# EAGLE board CR1000X MUX (EAGLE 9.6.2)
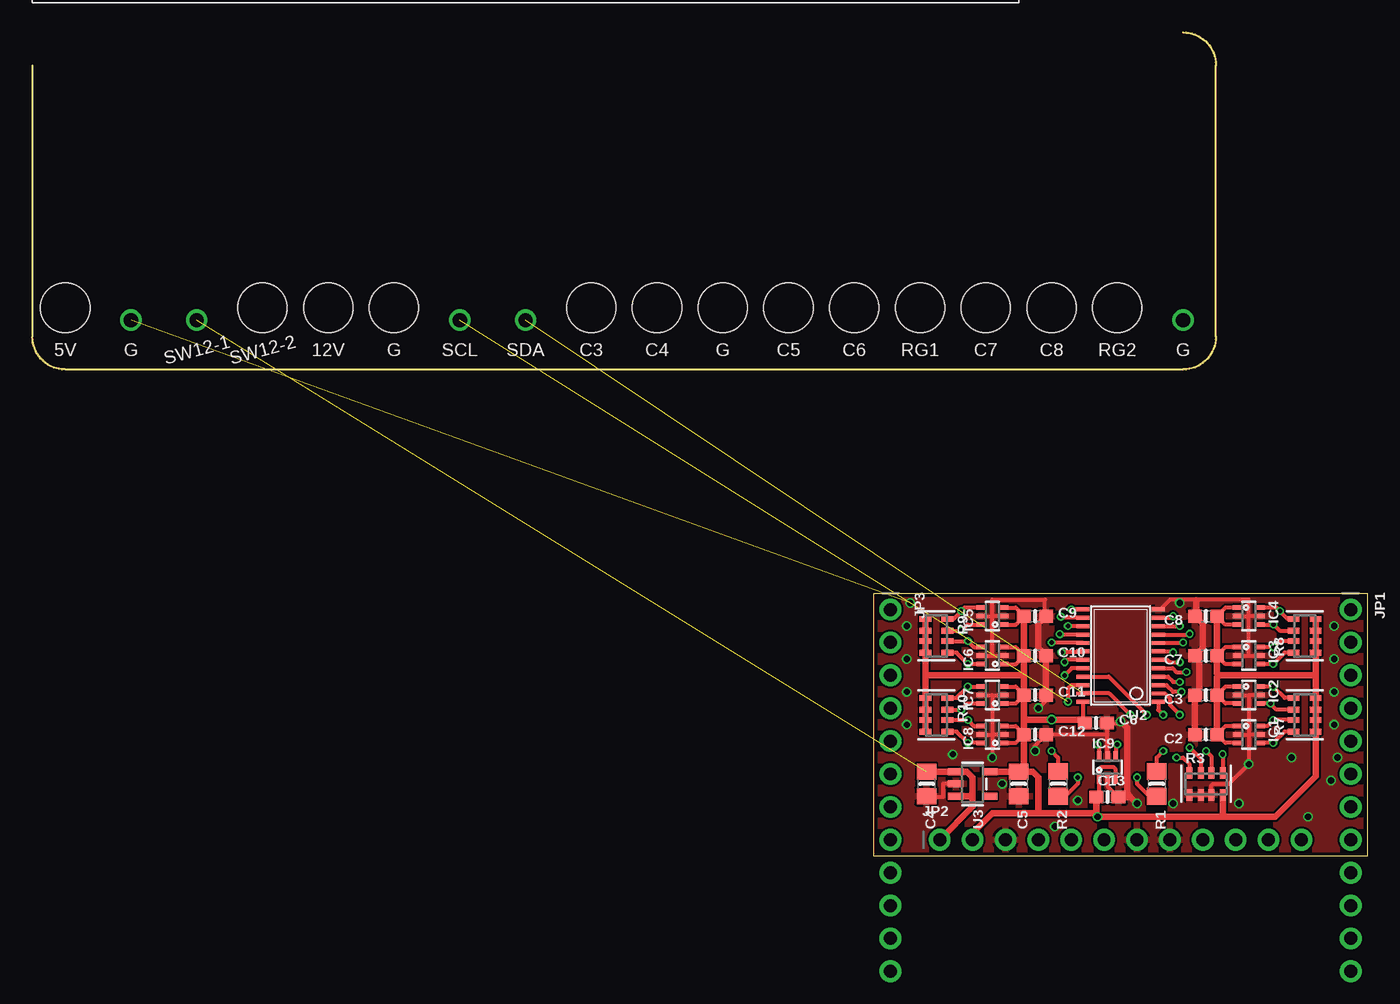
[diagram p0: board, top side]
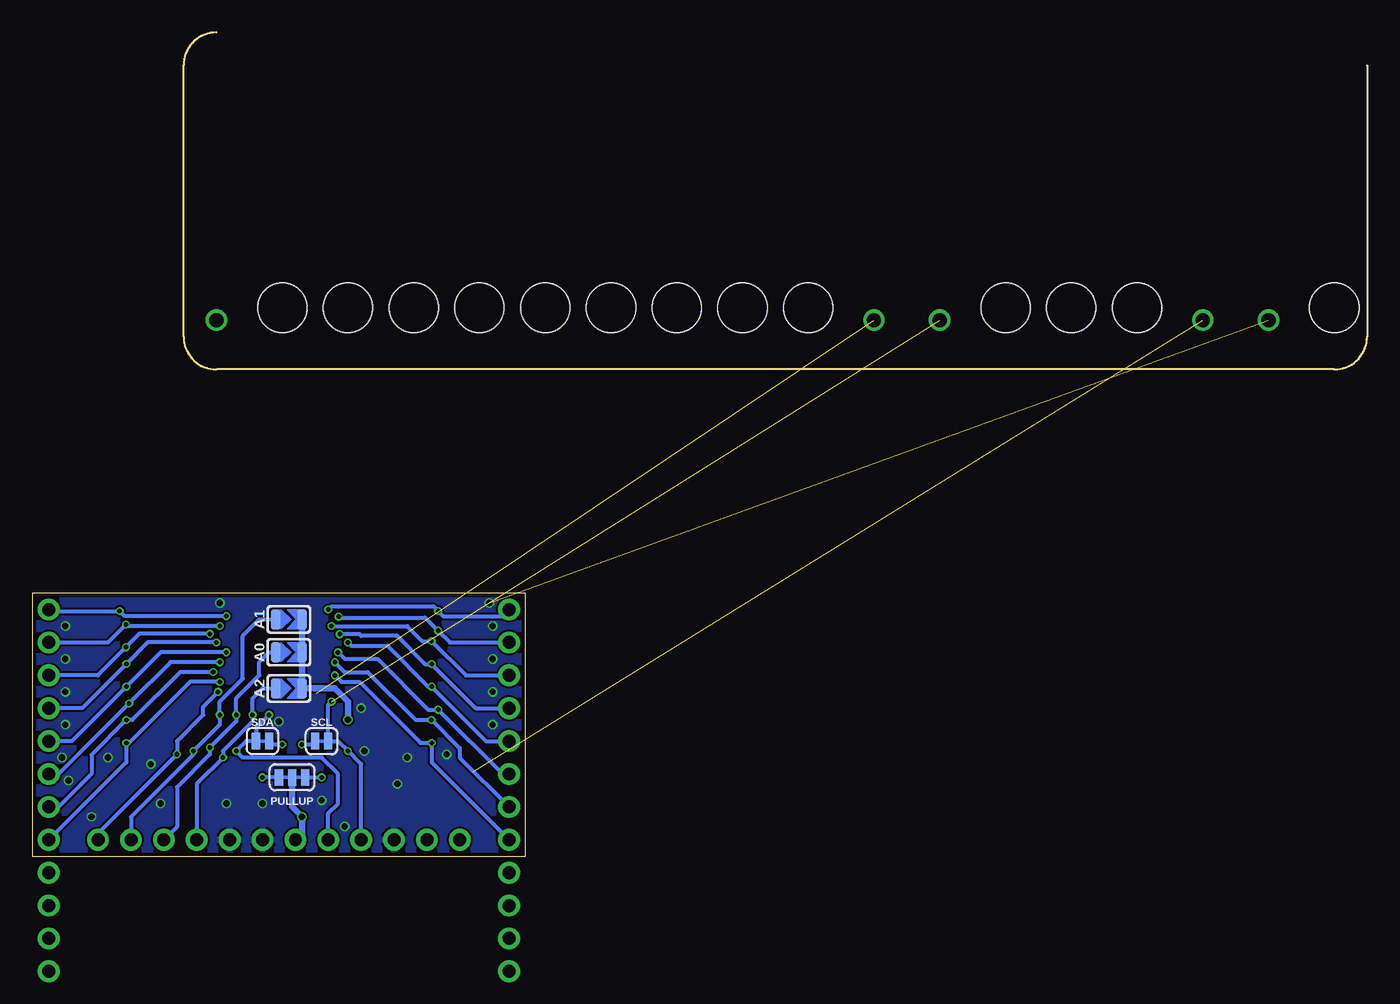
[diagram p1: board, bottom side, seen from below]

Size 103.12 x 63.63 mm. Coordinates in mm from the lower left corner, seen from the top.
Outline: 0,61.09 0,40.13 arc90 2.54,37.59 88.9,37.59 arc90 91.44,40.13 91.44,61.09 arc90 88.9,63.63
Outline: 65.02,20.32 103.12,20.32 103.12,0 65.02,0 65.02,20.32
Copper layers (1*16): Top 0.018mm / dielectric 1.55mm / Bottom 0.018mm
Design rules "eC_2Layer_PClass6_BaseCopperO18_eCDefault": minimum track width 0.15mm, minimum drill 0.35mm, track to track 0.15mm, track to pad 0.15mm, pad to pad 0.15mm, via to via 0.15mm, smd to smd 0mil, copper to edge 0.25mm, drill to drill 0.35mm, minimum pad ring 0.175mm, minimum via ring 0.125mm, stop-mask expansion 0mil, vias tented up to drill 0.45mm, thermal gap 0.2mm
Net classes: 1 highpower: width 0.305 mm, drill 0.483 mm; 2 lowpower: width 0.254 mm, drill 0.483 mm
Holes 3.81 mm at 2.54,42.35 17.78,42.35 22.86,42.35 27.94,42.35 43.18,42.35 48.26,42.35 53.34,42.35 58.42,42.35 63.5,42.35 68.58,42.35 73.66,42.35 78.74,42.35 83.82,42.35

## Footprints (pad centres in the part's own frame; a part is rotated, then mirrored left to right if it is on the bottom)
SOLDERJUMPER_ARROW_NOPASTE = smd 0.762 x 1.524: 1 -1.016,0; 2 1.016,0
0603-NO = smd 1.075 x 1: 1 -0.85,0; 2 0.85,0
0805-NO = smd 1.24 x 1.5: 1 -0.95,0; 2 0.95,0
SC70-6L = smd 0.35 x 0.8: 1 -0.65,-0.85; 2 0,-0.85; 3 0.65,-0.85; 4 0.65,0.85; 5 0,0.85; 6 -0.65,0.85
691311500018 = drill 1.6: 1 -43.18,0; 2 -38.1,0; 3 -33.02,0; 4 -27.94,0; 5 -22.86,0; 6 -17.78,0; 7 -12.7,0; 8 -7.62,0; 9 -2.54,0; 10 2.54,0; 11 7.62,0; 12 12.7,0; 13 17.78,0; 14 22.86,0; 15 27.94,0; 16 33.02,0; 17 38.1,0; 18 43.18,0
691311500015 = drill 1.6: 1 -35.56,0; 2 -30.48,0; 3 -25.4,0; 4 -20.32,0; 5 -15.24,0; 6 -10.16,0; 7 -5.08,0; 8 0,0; 9 5.08,0; 10 10.16,0; 11 15.24,0; 12 20.32,0; 13 25.4,0; 14 30.48,0; 15 35.56,0
WURTH_ELEKTRONIK_ELECTROMECHANIC_TERMINAL_BLOCKS_CONNECTORS_REV19D_691311500018 = drill 1.1: 1 -43.18,0; 2 -38.1,0; 3 -33.02,0; 4 -27.94,0; 5 -22.86,0; 6 -17.78,0; 7 -12.7,0; 8 -7.62,0; 9 -2.54,0; 10 2.54,0; 11 7.62,0; 12 12.7,0; 13 17.78,0; 14 22.86,0; 15 27.94,0; 16 33.02,0; 17 38.1,0; 18 43.18,0
1X12_ROUND = drill 1 pad 1.676: 1 -13.97,0; 2 -11.43,0; 3 -8.89,0; 4 -6.35,0; 5 -3.81,0; 6 -1.27,0; 7 1.27,0; 8 3.81,0; 9 6.35,0; 10 8.89,0; 11 11.43,0; 12 13.97,0
SMT-JUMPER_3_2-NC_TRACE_SILK = smd 0.635 x 1.27: 1 -1.016,0; 2 0,0; 3 1.016,0
0805-NO@1 = smd 1.3 x 1.5: 1 -0.95,0; 2 0.95,0
RESPACK_4X0603 = smd 0.45 x 0.9: 1 -1.3,-0.85; 2 -0.4,-0.85; 3 0.4,-0.85; 4 1.3,-0.85; 5 1.3,0.85; 6 0.4,0.85; 7 -0.4,0.85; 8 -1.3,0.85
SMT-JUMPER_2_NC_TRACE_SILK = smd 0.635 x 1.27: 1 -0.508,0; 2 0.508,0
TSSOP24 = smd 0.305 x 0.991: 1 -3.575,-2.918; 2 -2.925,-2.918; 3 -2.275,-2.918; 4 -1.625,-2.918; 5 -0.975,-2.918; 6 -0.325,-2.918; 7 0.325,-2.918; 8 0.975,-2.918; 9 1.625,-2.918; 10 2.275,-2.918; 11 2.925,-2.918; 12 3.575,-2.918; 13 3.575,2.918; 14 2.925,2.918; 15 2.275,2.918; 16 1.625,2.918; 17 0.975,2.918; 18 0.325,2.918; 19 -0.325,2.918; 20 -0.975,2.918; 21 -1.625,2.918; 22 -2.275,2.918; 23 -2.925,2.918; 24 -3.575,2.918
SOT23-5 = smd 0.55 x 1.2: 1 -0.95,-1.3; 2 0,-1.3; 3 0.95,-1.3; 4 0.95,1.3; 5 -0.95,1.3

## Placement (x,y rotation side)
A0  [SOLDERJUMPER_ARROW_NOPASTE]  83.31,15.75 0 bottom
A1  [SOLDERJUMPER_ARROW_NOPASTE]  83.31,18.29 0 bottom
A2  [SOLDERJUMPER_ARROW_NOPASTE]  83.31,12.95 0 bottom
C2  0.1uF  [0603-NO]  90.68,9.4 180 top
C3  0.1uF  [0603-NO]  90.68,12.45 180 top
C4  10uF  [0805-NO]  69.09,5.59 270 top
C5  10uF  [0805-NO]  76.2,5.59 270 top
C6  0.1uF  [0603-NO]  82.17,10.29 0 top
C7  0.1uF  [0603-NO]  90.68,15.49 180 top
C8  0.1uF  [0603-NO]  90.68,18.54 180 top
C9  0.1uF  [0603-NO]  77.47,18.54 0 top
C10  0.1uF  [0603-NO]  77.47,15.49 0 top
C11  0.1uF  [0603-NO]  77.47,12.45 0 top
C12  0.1uF  [0603-NO]  77.47,9.4 0 top
C13  0.1uF  [0603-NO]  83.06,4.57 0 top
IC1  LTC4311_SC70  [SC70-6L]  93.98,9.4 270 top
IC2  LTC4311_SC70  [SC70-6L]  93.98,12.45 270 top
IC3  LTC4311_SC70  [SC70-6L]  93.98,15.49 270 top
IC4  LTC4311_SC70  [SC70-6L]  93.98,18.54 270 top
IC5  LTC4311_SC70  [SC70-6L]  74.17,18.54 90 top
IC6  LTC4311_SC70  [SC70-6L]  74.17,15.49 90 top
IC7  LTC4311_SC70  [SC70-6L]  74.17,12.45 90 top
IC8  LTC4311_SC70  [SC70-6L]  74.17,9.4 90 top
IC9  LTC4311_SC70  [SC70-6L]  83.06,6.86 0 top
J1  [691311500018]  45.72,99.82 0 top  (outside the outline)
J2  [691311500015]  38.1,70.61 0 top  (outside the outline)
J3  [WURTH_ELEKTRONIK_ELECTROMECHANIC_TERMINAL_BLOCKS_CONNECTORS_REV19D_691311500018]  45.72,41.4 0 top
JP1  [1X12_ROUND]  101.85,5.08 270 top
JP2  [1X12_ROUND]  84.07,1.27 0 top
JP3  [1X12_ROUND]  66.29,5.08 270 top
PULLUP  JUMPER-SMT_3_2-NC_TRACE_SILK  [SMT-JUMPER_3_2-NC_TRACE_SILK]  83.06,6.1 0 bottom
R1  10K  [0805-NO@1]  86.87,5.59 270 top
R2  10K  [0805-NO@1]  79.25,5.59 270 top
R3  10K  [RESPACK_4X0603]  90.68,5.59 0 top
R7  10K  [RESPACK_4X0603]  98.3,10.92 90 top
R8  10K  [RESPACK_4X0603]  98.3,17.02 90 top
R9  10K  [RESPACK_4X0603]  69.85,17.02 270 top
R10  10K  [RESPACK_4X0603]  69.85,10.92 270 top
SCL  JUMPER-SMT_2_NC_TRACE_SILK  [SMT-JUMPER_2_NC_TRACE_SILK]  80.77,8.89 0 bottom
SDA  JUMPER-SMT_2_NC_TRACE_SILK  [SMT-JUMPER_2_NC_TRACE_SILK]  85.34,8.89 180 bottom
U2  TCA9548APWR  [TSSOP24]  84.07,15.49 90 top
U3  SPX3819M5-L-3-3  [SOT23-5]  72.64,5.59 270 top

## Library data of the parts
A0 A1 A2 = microbuilder; BOM: EXCLUDE
C2-C13 IC1-IC9 JP1-JP3 R1-R3 R7-R10 U2 U3 = microbuilder
J1 J2 = Wurth_Elektronik_Electromechanic_Terminal_Blocks_Connectors_rev19d
J3 = CR1000X proto
PULLUP SCL SDA = SparkFun-Jumpers

## Nets
0SCL: IC1.6 JP1.7 R7.7 U2.5
0SDA: IC1.4 JP1.8 R7.8 U2.4
1H: J1.1
1L: J1.2
1SCL: IC2.6 JP1.5 R7.5 U2.7
1SDA: IC2.4 JP1.6 R7.6 U2.6
2H: J1.4
2L: J1.5
2SCL: IC3.6 JP1.3 R8.7 U2.9
2SDA: IC3.4 JP1.4 R8.8 U2.8
3.3V [lowpower]: A0.2 A1.2 A2.2 C2.1 C3.1 C5.1 C6.1 C7.1 C8.1 C9.1 C10.1 C11.1 C12.1 C13.1 IC1.1 IC1.3 IC2.1 IC2.3 IC3.1 IC3.3 IC4.1 IC4.3 IC5.1 IC5.3 IC6.1 IC6.3 IC7.1 IC7.3 IC8.1 IC8.3 IC9.1 IC9.3 JP2.2 JP2.6 PULLUP.2 R3.4 R7.1 R7.2 R7.3 R7.4 R8.1 R8.2 R8.3 R8.4 R9.1 R9.2 R9.3 R9.4 R10.1 R10.2 R10.3 R10.4 U2.24 U3.5
3H: J1.10
3L: J1.11
3SCL: IC4.6 JP1.1 R8.5 U2.11
3SDA: IC4.4 JP1.2 R8.6 U2.10
4H: J1.13
4L: J1.14
4SCL: IC5.6 JP3.2 R9.7 U2.14
4SDA: IC5.4 JP3.1 R9.8 U2.13
5H: J2.1
5L: J2.2
5SCL: IC6.6 JP3.4 R9.5 U2.16
5SDA: IC6.4 JP3.3 R9.6 U2.15
5V: J3.1
6H: J2.4
6L: J2.5
6SCL: IC7.6 JP3.6 R10.7 U2.18
6SDA: IC7.4 JP3.5 R10.8 U2.17
7H: J2.10
7L: J2.11
7SCL: IC8.6 JP3.8 R10.5 U2.20
7SDA: IC8.4 JP3.7 R10.6 U2.19
8H: J2.13
8L: J2.14
12V: J3.5
A0: A0.1 JP2.10 R3.7 U2.1
A1: A1.1 JP2.11 R3.6 U2.2
A2: A2.1 JP2.9 R3.8 U2.21
C3: J3.9
C4: J3.10
C5: J3.12
C6: J3.13
C7: J3.15
C8: J3.16
G2: J3.6
G3: J3.11
G4: J3.18
GND [highpower]: C2.2 C3.2 C4.2 C5.2 C6.2 C7.2 C8.2 C9.2 C10.2 C11.2 C12.2 C13.2 IC1.2 IC1.5 IC2.2 IC2.5 IC3.2 IC3.5 IC4.2 IC4.5 IC5.2 IC5.5 IC6.2 IC6.5 IC7.2 IC7.5 IC8.2 IC8.5 IC9.2 IC9.5 J3.2 JP2.3 JP2.7 JP2.8 R3.1 R3.2 R3.3 U2.12 U3.2
N$1: PULLUP.3 R2.2
N$2: PULLUP.1 R1.2
N$5: IC9.6 SCL.1
N$6: IC9.4 SDA.1
P1: J1.16
P2: J1.18
RESET: JP2.12 R3.5 U2.3
RG1: J3.14
RG2: J3.17
SCL: J3.7 JP2.4 R2.1 SCL.2 U2.22
SDA: J3.8 JP2.5 R1.1 SDA.2 U2.23
SG1: J1.3
SG2: J1.6
SG3: J1.12
SG4: J1.15
SG5: J2.3
SG6: J2.6
SG7: J2.12
SG8: J2.15
SGP: J1.17
SGVX12: J1.9
SGVX34: J2.9
SW12-1: C4.1 J3.3 JP2.1 U3.1 U3.3
SW12-2: J3.4
VX1: J1.7
VX2: J1.8
VX3: J2.7
VX4: J2.8

## Tracks (layer width: path | path; a pad name or v marks a point on that pad's centre or on a via)
0SCL  (via drill 0.35)
  Top 0.305: R7.7 v95.87,10.52 95.39,10.05 IC1.6 | U2.5 88.1,14.52 88.39,14.22 v89.15,14.22
  Bottom 0.305: v89.15,14.22 91.69,14.22 95.4,10.52 v95.87,10.52 98.55,7.84 98.55,6.35 101.09,3.81 JP1.7
0SDA  (via drill 0.35)
  Top 0.305: R7.8 96.74,9.62 v95.87,8.75 IC1.4 | U2.4 87.73,13.87 88.14,13.46 v88.65,13.46
  Bottom 0.305: v88.65,13.46 90.93,13.46 95.65,8.75 v95.87,8.75 95.87,7.25 JP1.8
1SCL  (via drill 0.35)
  Top 0.305: R7.5 96.74,12.22 v95.87,13.1 IC2.6 | U2.7 88.07,15.82 v88.14,15.75
  Bottom 0.305: v88.14,15.75 93.22,15.75 v95.87,13.1 100.08,8.89 JP1.5
1SDA  (via drill 0.35)
  Top 0.305: R7.6 96.12,11.32 v95.65,11.8 IC2.4 | U2.6 87.7,15.17 87.88,14.99 v88.65,14.99
  Bottom 0.305: v88.65,14.99 92.46,14.99 v95.65,11.8 101.09,6.35 JP1.6
2SCL  (via drill 0.35)
  Top 0.305: R8.7 96.37,16.62 v95.9,16.14 IC3.6 | U2.9 89.35,17.12 v89.41,17.18
  Bottom 0.305: v89.41,17.18 94.87,17.18 v95.9,16.14 98.07,13.97 JP1.3
2SDA  (via drill 0.35)
  Top 0.305: R8.8 96.74,15.72 v95.87,14.84 IC3.4 | U2.8 88.86,16.47 v88.9,16.51
  Bottom 0.305: v88.9,16.51 94.2,16.51 v95.87,14.84 99.28,11.43 JP1.4
3.3V  (via drill 0.48)
  Top 0.305: IC1.1 92.18,10.05 C2.1 92.18,8.75 IC1.3 | IC2.1 92.18,13.1 C3.1 92.18,11.8 IC2.3 | IC3.1 92.18,16.14 C7.1 92.18,14.84 IC3.3 | IC4.1 92.18,19.19 C8.1 92.18,17.89 IC4.3 | IC6.1 75.97,14.84 C10.1 75.97,16.14 IC6.3 | IC5.1 75.97,17.89 C9.1 75.97,19.19 IC5.3 | IC7.3 75.97,13.1 C11.1 75.97,11.8 IC7.1 | IC8.3 75.97,10.05 C12.1 75.97,8.75 IC8.1 | U2.24 81.16,10.38 C6.1 | C13.1 82.41,4.77 IC9.1 82.41,6.72 82.55,6.86 83.57,6.86 83.71,6.72 IC9.3
  Top 0.508: R8.4 R8.3 R8.2 R8.1 99.15,13.97 | 99.15,13.97 R7.4 R7.3 R7.2 R7.1 99.15,6.18 96.01,3.05 91.95,3.05 | 99.15,13.97 91.69,13.97 | 91.69,13.97 91.53,14.14 C7.1 C8.1 | 91.69,13.97 91.53,13.8 C3.1 C2.1 | R9.1 R9.2 R9.3 R9.4 69,13.97 | R10.4 R10.3 R10.2 R10.1 69,13.97 | C9.1 C10.1 76.62,13.97 | 76.62,13.97 C11.1 76.62,10.54 | 76.62,10.54 C12.1 76.62,6.96 C5.1 | 76.62,13.97 69,13.97 | C6.1 81.01,10.54 v78.74,10.54 76.62,10.54 | C5.1 U3.5 | C5.1 77.28,6.54 77.72,6.1 77.72,3.3 | v82.3,3.05 82.04,3.3 77.72,3.3 | v82.3,3.05 91.95,3.05 | R3.4 91.98,3.08 91.95,3.05 | C13.1 82.21,3.14 v82.3,3.05 | 77.72,3.3 74.17,3.3 72.64,1.78 JP2.2
  Bottom 0.508: A1.2 A0.2 A2.2 79.76,12.95 78.74,11.94 v78.74,10.54 | JP2.6 82.3,1.78 v82.3,3.05 83.06,3.81 PULLUP.2
3SCL  (via drill 0.35)
  Top 0.305: R8.5 97,18.32 v96.38,18.94 96.12,19.19 IC4.6 | U2.11 88.02,18.42 v88.14,18.54
  Bottom 0.305: v88.14,18.54 95.98,18.54 v96.38,18.94 101.74,18.94 JP1.1
3SDA  (via drill 0.35)
  Top 0.305: IC4.4 v95.9,17.89 96.37,17.42 R8.6 | U2.10 v88.63,17.77 v88.65,17.78
  Bottom 0.305: v88.65,17.78 95.79,17.78 v95.9,17.89 97.28,16.51 JP1.2
4SCL  (via drill 0.35)
  Top 0.305: R9.7 v71.77,17.42 72.25,17.89 IC5.6 | U2.14 79.53,18.42 v79.46,18.5
  Bottom 0.305: v79.46,18.5 79.39,18.43 72.79,18.43 v71.77,17.42 70.87,16.51 JP3.2
4SDA  (via drill 0.35)
  Top 0.305: R9.8 71.15,18.32 v71.77,18.94 72.02,19.19 IC5.4 | U2.13 80.28,19.07 v80.26,19.05
  Bottom 0.305: v80.26,19.05 80.01,19.3 72.14,19.3 v71.77,18.94 71.37,18.54 66.8,18.54 JP3.1
5SCL  (via drill 0.35)
  Top 0.305: IC6.6 v72.28,14.84 71.4,15.72 R9.5 | U2.16 79.4,17.12 v79.38,17.14
  Bottom 0.305: v79.38,17.14 77.85,17.14 77.72,17.02 74.96,17.02 72.79,14.84 v72.28,14.84 68.86,11.43 JP3.4
5SDA  (via drill 0.35)
  Top 0.305: R9.6 v72.28,16.62 72.76,16.14 IC6.4 | U2.15 v80.02,17.77 v80.01,17.78
  Bottom 0.305: v80.01,17.78 74.17,17.78 73.01,16.62 v72.28,16.62 69.63,13.97 JP3.3
6SCL  (via drill 0.35)
  Top 0.305: R10.7 v71.77,11.32 72.25,11.8 IC7.6 | U2.18 81.08,15.75 v79.5,15.75
  Bottom 0.305: v79.5,15.75 78.99,15.24 76.45,15.24 72.54,11.32 v71.77,11.32 66.8,6.35 JP3.6
6SDA  (via drill 0.35)
  Top 0.305: R10.8 71.4,12.22 v72.28,13.1 IC7.4 | U2.17 78.78,16.47 v78.74,16.51
  Bottom 0.305: v78.74,16.51 78.49,16.26 75.69,16.26 72.53,13.1 v72.28,13.1 68.07,8.89 JP3.5
7SCL  (via drill 0.35)
  Top 0.305: IC8.6 v72.28,8.75 71.4,9.62 R10.5 | U2.20 80.3,14.52 v79.76,13.97
  Bottom 0.305: v79.76,13.97 79.25,13.46 77.86,13.46 73.14,8.75 v72.28,8.75 72.28,7.25 JP3.8
7SDA  (via drill 0.35)
  Top 0.305: R10.6 v72.28,10.52 72.76,10.05 IC8.4 | U2.19 79.94,15.17 v79.76,14.99
  Bottom 0.305: v79.76,14.99 78.99,14.22 77.22,14.22 73.51,10.52 v72.28,10.52 70.1,8.34 70.1,7.62 JP3.7
A0  (via drill 0.35)
  Top 0.305: U2.1 86.99,11.31 v87.38,10.92 | v89.41,8.38 90.28,7.51 R3.7
  Bottom 0.305: A0.1 84.84,15.75 85.6,14.99 85.6,13.97 87.38,12.19 v87.38,10.92 87.38,10.41 v89.41,8.38 89.41,7.87 91.95,5.33 91.95,2.29 JP2.10
A1  (via drill 0.35)
  Top 0.305: U2.2 87.51,12.57 87.88,12.19 87.88,11.68 v88.65,10.92 | v90.68,8.13 91.08,7.73 R3.6
  Bottom 0.305: A1.1 85.6,18.29 86.87,17.02 86.87,13.72 88.65,11.94 v88.65,10.92 88.65,10.16 v90.68,8.13 90.68,7.87 95.5,3.05 JP2.11
A2  (via drill 0.35)
  Top 0.305: U2.21 83.16,13.87 v86.11,10.92 | R3.8 89.38,7.14 88.9,7.62 v88.39,7.62
  Bottom 0.305: A2.1 85.34,12.95 86.11,12.19 v86.11,10.92 86.11,10.41 88.39,8.13 v88.39,7.62 90.42,5.59 JP2.9
GND  (via drill 0.48)  (1 unrouted)
  Top 0.305: C13.2 83.06,5.42 IC9.2 | IC2.5 93.98,12.45 | 93.98,12.45 93.98,9.4 | 93.98,9.4 v93.98,7.11 92.46,5.59 91.19,5.59 91.08,5.48 R3.3 R3.2 R3.1 | IC2.2 93.98,12.45 | IC1.2 93.98,9.4 | IC1.5 93.98,9.4 | IC3.2 93.98,15.49 | 93.98,15.49 IC3.5 | 93.98,15.49 93.98,18.54 | 93.98,18.54 93.98,19.81 87.88,19.81 87.14,19.07 U2.12 | IC4.2 93.98,18.54 | IC4.5 93.98,18.54 | IC7.5 74.17,12.45 | 74.17,12.45 IC7.2 | IC8.5 74.17,9.4 | IC8.2 74.17,9.4 | 74.17,12.45 74.17,9.4 | 74.17,9.4 v74.17,7.62 | IC6.5 74.17,15.49 | 74.17,15.49 IC6.2 | IC5.5 74.17,18.54 | IC5.2 74.17,18.54 | 74.17,15.49 74.17,18.54 | 74.17,18.54 74.17,19.81 78.23,19.81 78.23,18.63 C9.2 | U3.2 70.36,5.59 70.36,4.57 69.15,4.57 C4.2 | IC9.5 83.06,9.4 | 83.06,9.4 83.06,10.25 C6.2 83.95,10.29 v84.07,10.41 | 83.06,9.4 C12.2 77.47,8.55 v77.47,8.13 | v77.72,11.43 78.32,12.03 C11.2
  Top 0.508: C11.2 C10.2 77.72,16.09 77.72,17.95 C9.2 | C2.2 C3.2 90.17,12.79 90.17,15.15 C7.2 90.42,16.09 90.42,17.95 C8.2 89.92,18.63 89.92,19.78 | v85.34,4.06 84.84,4.57 | 84.84,4.57 C13.2 | 84.84,4.57 84.58,4.83 84.58,9.91 v84.07,10.41
  other vias: 88.14,4.06 74.93,5.59 71.12,7.87 80.77,4.32 97.28,7.62 98.55,3.05 88.65,19.56 78.99,2.29 100.33,5.84 100.84,7.62 100.58,10.16 100.58,12.7 100.58,15.24 100.58,17.78 67.56,10.16 67.56,12.7 67.56,15.24 67.56,17.78 67.82,19.56 93.22,4.06
  pour Top: 61.98,-4.06 61.98,21.34 62.23,21.59 104.14,21.59 104.39,21.34 104.39,-3.05 103.12,-4.32 62.23,-4.32
  pour Bottom: 60.71,-5.08 60.71,21.34 62.23,22.86 104.65,22.86 105.66,21.84 105.66,-3.3 103.63,-5.33 61.21,-5.33 60.96,-5.08
N$1  (via drill 0.35)
  Top 0.305: v80.77,6.1 80.77,5.59 79.82,4.64 R2.2
  Bottom 0.305: PULLUP.3 v80.77,6.1
N$2  (via drill 0.35)
  Top 0.305: v85.34,6.1 85.34,5.59 86.29,4.64 R1.2
  Bottom 0.305: PULLUP.1 v85.34,6.1
N$5  (via drill 0.35)
  Top 0.305: v82.3,8.64 82.41,8.52 IC9.6
  Bottom 0.305: v82.3,8.64 81.53,8.64 SCL.1
N$6  (via drill 0.35)
  Top 0.305: v83.82,8.64 83.71,8.52 IC9.4
  Bottom 0.305: SDA.1 84.58,8.64 v83.82,8.64
RESET  (via drill 0.35)
  Top 0.305: U2.3 87.62,13.22 88.14,12.7 v88.77,12.7 | v91.95,7.87 91.98,7.84 R3.5
  Bottom 0.305: JP2.12 98.04,1.78 v91.95,7.87 91.95,8.89 89.92,10.92 89.92,11.56 v88.77,12.7
SCL  (via drill 0.35)  (1 unrouted)
  Top 0.305: U2.22 80.27,13.22 80.01,12.95 v80.01,11.94 | v78.74,8.13 79.25,7.62 R2.1
  Bottom 0.305: v80.01,11.94 80.26,11.68 SCL.2 79.5,8.89 v78.74,8.13 77.72,7.11 JP2.4
SDA  (via drill 0.35)  (1 unrouted)
  Top 0.305: v84.84,10.92 83.19,12.57 U2.23 | v87.38,8.13 86.87,7.62 R1.1
  Bottom 0.305: v84.84,10.92 85.85,9.91 SDA.2 86.61,8.89 v87.38,8.13 86.87,7.62 80.77,7.62 79.5,6.35 79.5,4.06 80.26,3.3 JP2.5
SW12-1  (1 unrouted)
  Top 0.508: C4.1 U3.1 72.2,6.54 72.64,6.1 72.64,4.57 | 72.64,4.57 72.64,3.81 JP2.1 | U3.3 72.58,4.64 72.64,4.57

## Text on the board
tPlace: 5V | G | SW12-1 | SW12-2 | 12V | G | SCL | SDA | C3 | C4 | G | C5 | C6 | RG1 | C7 | C8 | RG2 | G